# Altium PCB HV.PcbDoc (part 1 of 2)
Units mil, origin at the board's own origin, x right, y up, seen from the top; angles counter-clockwise.
Board outline 2765.94 x 3947.04 mil, 2 copper layers (Top Layer, Bottom Layer); 98 components, 67 nets, 300 pads, 27 vias.
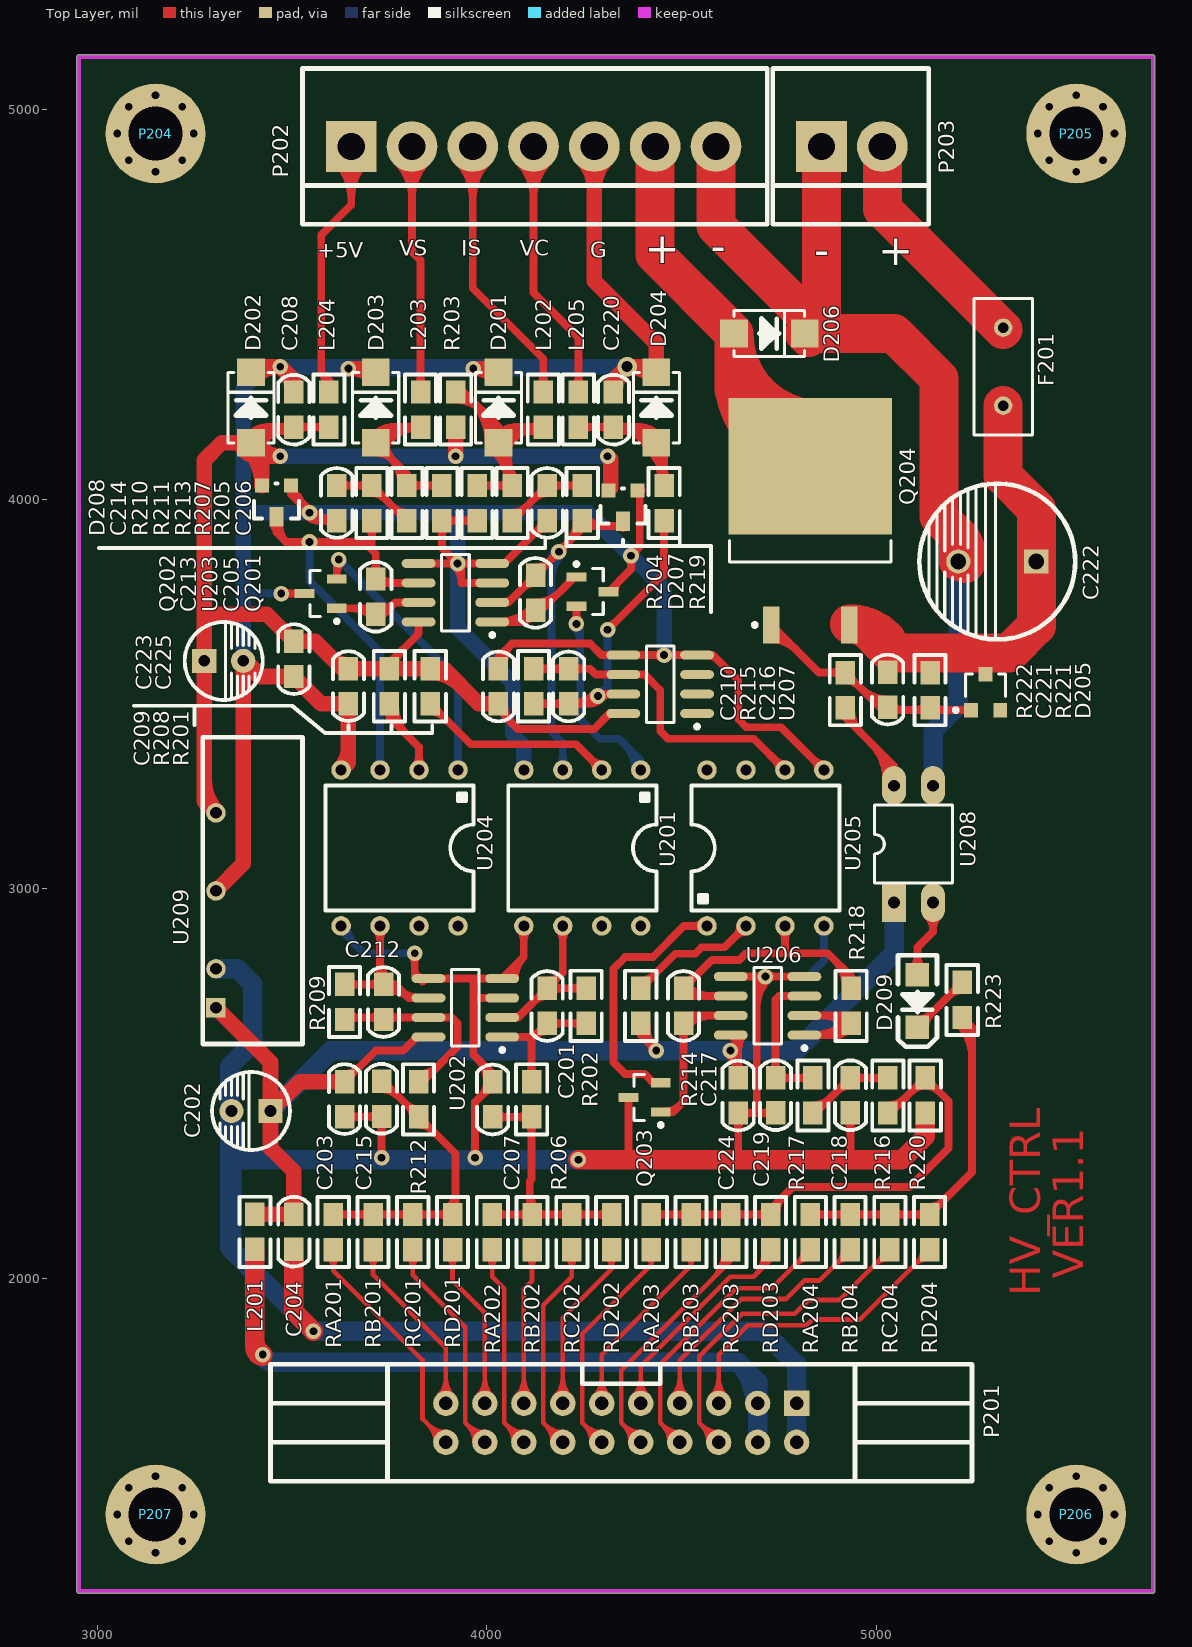
[diagram p0: Top Layer view]
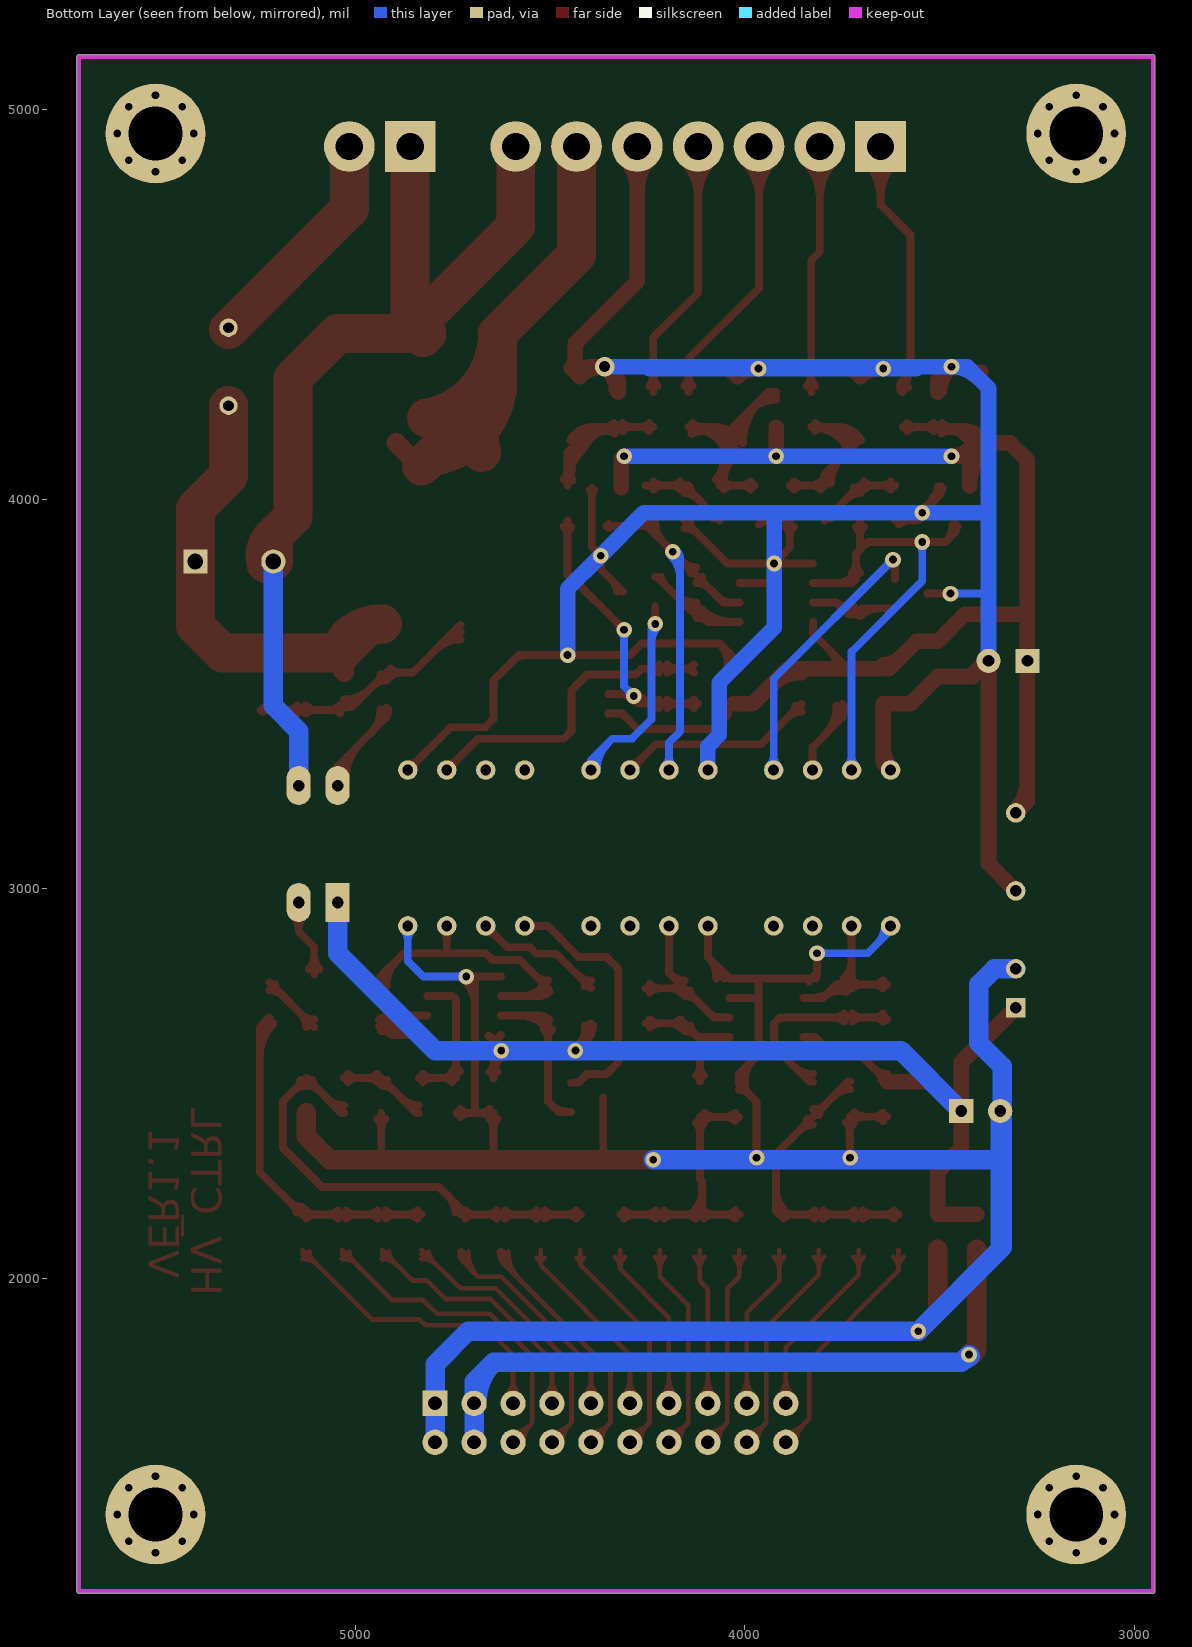
[diagram p1: Bottom Layer view, seen from below]

## Layer stack, top to bottom
Top Layer: signal copper 1.4
Dielectric: dielectric 12.6, FR-4, Dk 4.8
Bottom Layer: signal copper 1.4

## Board outline
2948.17,1197.99 ccw(c2953.19,1197.99) 2953.19,1192.98 5709.09,1192.98 ccw(c5709.09,1197.99) 5714.11,1197.99 5714.11,5135 ccw(c5709.09,5135) 5709.09,5140.02 2953.19,5140.02 ccw(c2953.19,5135) 2948.17,5135

## Design rules (kind name [scope] priority, off if disabled: settings)
Clearance [All] p1: gap=10
ComponentClearance [All] p1: gap=0 collisioncheckmode=3 verticalgap=0 showdistances=FALSE
PolygonConnect [All] p1: connectstyle=Relief reliefconductorwidth=10 reliefentries=4 polygonreliefangle="90 Angle"
RoomDefinition HV [InComponentClass('HV')] p1 off: confinementstyle=ConfineIn formatcopy=TRUE lockcomponents=FALSE outline 3006.1,1244.45 5656.1,1244.45 5656.1,5124.45 3006.1,5124.45
RoutingVias [All] p1: holewidth=28 width=50 viastyle="Through Hole" minholewidth=20 minwidth=40 maxholewidth=28 maxwidth=100
SilkscreenOverComponentPads [All] p1: minsilkscreentomaskgap=10
SolderMaskExpansion [All] p1: expansion=4
Width [All] p1: maxlimit=100 minlimit=10 preferedwidth=10
26 further rules are at their usual default settings.

## Components (designator, comment, footprint, x,y, rotation, side; value= is the part's Value field where it differs from the comment)
C201 "1nF" C0805 4155,2745 r270 top
C202 "Cap Pol2" CD1/2 3345,2430 r90 top
C203 "100nF" C0805 3635,2415.17 r90 top
C204 "100nF" C0805 3505,2075 r90 top
C205 "1nF" C0805 4125,3805 r270 top
C206 "100nF" C0805 4155,3945 r90 top
C207 "100nF" C0805 4015,2505 r270 top
C208 "100nF" C0805 3505,4275 r270 top
C209 "100nF" C0805 3645,3475 r90 top
C210 "100nF" C0805 4030,3565 r270 top
C212 "1nF" C0805 3735,2755 r270 top
C213 "1nF" C0805 3715,3795 r270 top
C214 "100nF" C0805 3615,3945 r90 top
C215 "100nF" C0805 3730,2416 r90 top
C216 "1nF" C0805 4210,3565 r270 top
C217 "1nF" C0805 4505,2745 r270 top
C218 "100nF" C0805 4933,2425.17 r90 top
C219 "100nF" C0805 4741,2425.17 r90 top
C220 "100nF" C0805 4325,4275 r270 top
C221 "100nF" C0805 5028.63,3466 r90 top
C222 "100uF/50V" CD2/4 5210,3840 r90 top
C223 "100uF/16V" CD1/2 3375,3585 r270 top
C224 "100nF" C0805 4645,2515 r270 top
C225 "100nF" C0805 3505,3635 r270 top
D201 "SMA6J18CA" SMA 4030,4235 r90 top
D202 "SMA6J18CA" SMA 3395,4235 r90 top
D203 "SMA6J18CA" SMA 3715,4235 r90 top
D204 "SMA6J18CA" SMA 4435,4235 r90 top
D205 "BZX84C12LT1" 318-07 5280,3505 r0 top
D206 "SMA6J36CA" SMA 4725,4425 r0 top
D207 "BAV99" SOT-23 4386.95,4022.77 r180 top
D208 "BAV99" SOT-23 3498,4035 r180 top
D209 "1N4148" D1206 5105,2780 r270 top
F201 "FRK300-60F" RAD-0.2 5325,4340 r270 top
L201 "BLM21PG331SN1" L0805 3405,2075 r90 top
L202 "BLM21AG601SN1" L0805 4145,4185 r90 top
L203 "BLM21AG601SN1" L0805 3830,4185 r90 top
L204 "BLM21PG331SN1" L0805 3595,4275 r270 top
L205 "BLM21AG601SN1" L0805 4235,4275 r270 top
P201 "Header 10X2" IDC20-EJ 4795,1680 r180 top
P202 "Header 7" 3.96-7 3651.99,4905 r180 top
P203 "24V_M" 3.96-2 4859,4905 r180 top
P204 "Header 9" LK 3150.04,4938.15 r0 top
P205 "Header 9" LK 5512.24,4938.15 r0 top
P206 "Header 9" LK 5512.24,1394.84 r0 top
P207 "Header 9" LK 3150.04,1394.84 r0 top
Q201 "MMBT3906" SOT23_N 4271.34,3762.6 r0 top
Q202 "MMBT3906" SOT23_N 3573.66,3757.6 r180 top
Q203 "MMBT3906" SOT23_N 4405,2465 r180 top
Q204 "IRF9540S" D2PAK_N 4830,3945 r90 top
R201 "100" R0805 3855,3565 r270 top
R202 "51K" R0805 4255,2655 r90 top
R203 "10K" R0805 3920,4185 r90 top
R204 "100K" R0805 4245,3945 r90 top
R205 "100K" R0805 4065,3945 r90 top
R206 "100" R0805 4115,2505 r270 top
R207 "10K" R0805 3975,3945 r90 top
R208 "100" R0805 3750,3565 r270 top
R209 "51K" R0805 3635,2665 r90 top
R210 "100K" R0805 3705,3945 r90 top
R211 "10K" R0805 3795,3945 r90 top
R212 "100" R0805 3825,2505 r270 top
R213 "10K" R0805 3885,3945 r90 top
R214 "100" R0805 4395,2655 r90 top
R215 "100K" R0805 4120,3475 r90 top
R216 "100K" R0805 5029,2515 r270 top
R217 "100K" R0805 4837,2515 r270 top
R218 "51K" R0805 4935,2744.83 r270 top
R219 "100" R0805 4455,3945 r90 top
R220 "100K" R0805 5125,2425 r90 top
R221 "10K" R0805 5137.25,3465 r90 top
R222 "10K" R0805 4920,3555 r270 top
R223 "330" R0805 5220,2670 r90 top
RA201 "0" R0805 3606.1,2164.45 r270 top
RA202 "0" R0805 4014.1,2164.45 r270 top
RA203 "0" R0805 4422.1,2164.45 r270 top
RA204 "0" R0805 4830.1,2164.45 r270 top
RB201 "0" R0805 3708.1,2164.45 r270 top
RB202 "0" R0805 4116.1,2164.45 r270 top
RB203 "0" R0805 4524.1,2164.45 r270 top
RB204 "0" R0805 4932.1,2164.45 r270 top
RC201 "0" R0805 3810.1,2164.45 r270 top
RC202 "0" R0805 4218.1,2164.45 r270 top
RC203 "0" R0805 4626.1,2164.45 r270 top
RC204 "0" R0805 5034.1,2164.45 r270 top
RD201 "0" R0805 3912.1,2164.45 r270 top
RD202 "0" R0805 4320.1,2164.45 r270 top
RD203 "0" R0805 4728.1,2164.45 r270 top
RD204 "0" R0805 5136.1,2164.45 r270 top
U201 "HCNR201" DIP-8-1 4395,3305 r270 top
U202 "LM2904D" 751-02_N 3945,2695 r180 top
U203 "LM2904D" 751-02_N 3919.49,3760 r180 top
U204 "HCNR201" DIP-8-1 3926.18,3305 r270 top
U205 "HCNR201" DIP-8-1 4565,2905 r90 top
U206 "LM2904D" 751-02_N 4720.51,2700 r180 top
U207 "LM2904D" 751-02_N 4445,3525 r180 top
U208 "TLP521" DIP4 5045,2965 r0 top
U209 "MORNSUN-BLS0505" MORNSUN-BLS 3305,2695 r270 top

## Footprints (in the part's own frame and the unit in brackets; to place one, negate y for a bottom-side part, rotate by r counter-clockwise, add the part's x,y. Pads: shape width x height; smd on the part's side, far side on the other; paste and mask are expansions set on the pad)
3.96-2 [mil]
  rect 130x130 hole 70: 1(0,0)
  round 130 hole 70: 2(-156,0)
  silkscreen extent -275,-200 125,200
3.96-7 [mil]
  rect 130x130 hole 70: 1(0,0)
  round 130 hole 70: 2(-156,0) 3(-312,0) 4(-468,0) 5(-624,0) 6(-780,0) 7(-936,0)
  silkscreen extent -1068,-200 125,200
318-07 [mm] "SOT-23; 3 Leads; Body 3.0 x 2.5 mm, inc. leads (LxW max)"
  rect 0.9x0.95 smd: 1(-0.95,-1.175) 2(0.95,-1.175) 3(0,1.175)
  silkscreen extent -2.07,-1.3 1.3,1.18
751-02_N [mm] "SOIC, 8-Leads, Body 4.9x3.9mm, Pitch 1.27mm, IPC Medium Density"
  oval 2.2x0.6 smd: 1(-2.4,1.905) 2(-2.4,0.635) 3(-2.4,-0.635) 4(-2.4,-1.905) 5(2.4,-1.905) 6(2.4,-0.635) 7(2.4,0.635) 8(2.4,1.905)
  silkscreen extent -2.53,-2.5 0.9,2.88, body extent -1.95,-2.45 1.95,2.45, height 1.75
C0805 [mil]
  rect 60x50 smd: 1(0,0) 2(90,0)
  silkscreen extent -44,-40 135,40
CD1/2 [mil]
  rect 62x62 hole 30: 1(0,-100)
  round 62 hole 30: 2(0,0)
  silkscreen extent -100,-150 100,50
CD2/4 [mil]
  rect 62x62 hole 40: 1(0,-200)
  round 62 hole 40: 2(0,0)
  silkscreen extent -200,-300 200,100
D2PAK_N [mm] "D2-PAK, 4-Leads, Body 8.8x10.4mm, Pitch 2.54mm, Lead Span 15.1mm, IPC Medium Density"
  rect 2.4x1.05 smd: 1(-6.8,2.54) 3(-6.8,-2.54)
  rect 8.9x10.65 smd: 2(3.55,0)
  silkscreen extent -6.92,-5.25 -1.3,5.25, body extent -2.7,-5.28 6.3,5.28, height 4.69
D1206 [mil]
  rect 60x60 smd: 1(0,0) 2(135,0)
  silkscreen extent -50,-50 185,50
DIP4 [mil]
  rect 62x100 hole 30: 1(0,0)
  oval 62x100 hole 30: 2(100,0) 3(100,300) 4(0,300)
  silkscreen extent -50,50 150,250
DIP-8-1 [mil]
  round 50 hole 28: 1(0,0) 2(0,-100) 3(0,-200) 4(0,-300) 5(400,-300) 6(400,-200) 7(400,-100) 8(400,0)
  silkscreen extent 40,-340 360,40
IDC20-EJ [mil]
  rect 65x65 hole 35: 1(0,0)
  round 65 hole 35: 2(0,100) 3(100,0) 4(100,100) 5(200,0) 6(200,100) 7(300,0) 8(300,100) 9(400,0) 10(400,100) 11(500,0) 12(500,100) 13(600,0) 14(600,100) 15(700,0) 16(700,100) 17(800,0) 18(800,100) 19(900,0) 20(900,100)
  silkscreen extent -450,-100 1350,200
L0805 [mil]
  rect 60x50 smd: 1(0,0) 2(90,0)
  silkscreen extent -45,-40 135,40
LK [mm]
  round 6.5 hole 3.5: 1(0,0)
  round 1 hole 0.5: 2(0,2.5) 3(2.5,0) 4(0,-2.5) 5(-1.75,-1.75) 6(-1.75,1.75) 7(1.75,1.75) 8(1.75,-1.75) 9(-2.5,0)
MORNSUN-BLS [mil]
  rect 50x50 hole 30: 1(0,0)
  round 50 hole 30: 2(-100,0) 4(-300,0) 6(-500,0)
  silkscreen extent -694,-34 93,222
R0805 [mil]
  rect 60x50 smd: 1(0,0) 2(90,0)
  silkscreen extent -45,-40 135,40
RAD-0.2 [mm] "Radial Cap, Thru-Hole; 2 Leads; 0.2 in Pin Spacing"
  round 1.2 hole 0.7: 1(-2.54,0) 2(2.54,0)
  silkscreen extent -4.44,-1.91 4.44,1.91
SMA [mm]
  rect 1.8x1.8 smd: 1(-2.3,0) 2(2.3,0)
  silkscreen extent -2.3,-1.5 2.3,1.5
SOT23_N [mm] "SOT23, 3-Leads, Body 2.9x1.3mm, Pitch 0.95mm, Lead Span 2.3mm, IPC Medium Density"
  rect 1.3x0.6 smd: 1(-1.05,0.95) 2(-1.05,-0.95) 3(1.05,0)
  silkscreen extent -1.17,-1.5 0.7,1.92, body extent -0.7,-1.5 0.7,1.5, height 1.1
SOT-23 [mil]
  rect 36x36 smd: 1(0,0) 2(75,0)
  rect 36x50 smd: 3(38,80)
  silkscreen extent -20,-5 95,85

## Part data
C202: "Polariz"
C222: library part CD1, "Electrolytic Capacitor"
C223: library part CD1, "El"
D205: "Zener Voltage Regulator Diode"
D207 D208: "Silicon Switching Diode Array for High-Speed Switching"
D209: library part 2JG
F201: library part FUSE1, "Fuse"
L203 L204: library part L1
P201: "Header, 10-P"
P202 P204 P205 P206 P207: "He"
P203: library part "Header 2", "He"
Q201 Q202 Q203: "PNP Switching Transistor"
Q204: "HEXFET P-Channel Power MOSFET"
U202 U203 U206 U207: "Dual Low-Power Operational Amplifier"
U209: library part MORNS

## Via types
v1: diameter 40, hole 20, Top Layer to Bottom Layer, 26 vias
v2: diameter 50, hole 28, Top Layer to Bottom Layer, 1 vias

## Nets (pads, with @x,y where several pads share a name; then routed paths per layer and width w, separated by ;. In a path a pad name is that pad's centre, name@x,y a point inside that pad or via, vN(x,y) a via of type N, cw(c..) or ccw(c..) an arc to the next point about the centre after c; other vN are vias at no path point)
+5V_HV: C208.2 C209.2 C210.2 C223.1 C225.1 D202.1 D207.2 D208.2 L204.2 R201.1 R203.1 R208.1 U203.8 U207.8 U209.6 | length 5364.1
  Top Layer w20: 3275,3625 3285,3635 ; D202.1@3382.15,4151.31 cw(c3438.32,4121.34) 3438.32,4185 ; D202.1@3395,4144.45 3435.55,4185 ; D202.1@3396.26,4169.85 ccw(c3398.83,4221.72) 3435.55,4185 ; D202.1@3399.79,4141.89 cw(c3471.66,4103.55) 3471.66,4185 ; D202.1@3417.44,4132.48 cw(c3505,4085.76) C208.2@3505,4185 ; D202.1@3420.4,4145.71 cw(c3472.27,4148.28) 3435.55,4185 ; 3463.46,4173.87 cw(c3473.5,4136.41) C208.2@3496.21,4167.84 ; C208.2@3480.04,4178.31 ccw(c3474.93,4197.36) C208.2@3492.01,4187.5 ; C208.2@3494.39,4174.39 ccw(c3468.79,4148.79) 3468.79,4185 ccw(c3468.79,4221.21) C208.2@3494.39,4195.61 ; C208.2@3515.61,4174.39 cw(c3541.21,4148.79) 3541.21,4185 cw(c3541.21,4221.21) C208.2@3515.61,4195.61 ; 3555,3635 3625,3565 3630,3565 C209.2@3645,3565 cw(c3645,3613.28) 3610.86,3579.14 ; 3576.72,3613.28 ccw(c3645,3681.57) C209.2@3645,3585 ; L204.2@3584.39,4174.39 ccw(c3558.79,4148.79) 3558.79,4185 ccw(c3558.79,4221.21) L204.2@3584.39,4195.61 ; L204.2@3595,4185 C208.2@3505,4185 ; R208.1@3750,3565 3750,3580 3825,3655 U203.8@3825,3685 ; R208.1@3765,3570 cw(c3825.36,3570) 3782.68,3612.68 ; 3979,3476 4045,3476 C210.2@4045,3460 ; 3991.37,3476 cw(c3991.37,3436.37) C210.2@4019.39,3464.39 ; 3996.2,3476 ccw(c3996.2,3508.8) C210.2@4019.39,3485.61 ; C210.2@4030,3475 C210.2@4045,3460 ; C210.2@4045,3470 ccw(c4105.36,3470) 4062.68,3427.32 ; U207.8@4350.51,3450 4315,3450 4275,3410 4080,3410 4045,3445 C210.2@4045,3460 ; 3435.55,4185 C208.2@3505,4185
  Top Layer w40: 3275,3279.5 ccw(c3389.5,3279.5) U209.6@3308.54,3198.54 ; U209.6@3305,3195 3275,3225 C223.1@3275,3585 3275,3625 3275,3705 ; D202.1@3372.34,4134.95 ccw(c3409.86,4150.68) D202.1@3409.86,4110 ; D202.1@3384.09,4155.36 cw(c3357.74,4181.71) 3357.74,4144.45 cw(c3357.74,4107.19) 3384.09,4133.54 cw(c3291.11,4040.56) D208.2@3422.6,4040.56 ; D202.1@3409.23,4150.42 ccw(c3470,4175.89) v1(3470,4110) 3429.45,4110 D202.1@3422.6,4116.85 ; D208.2@3422.6,4034.21 D202.1@3422.6,4116.85 ; 3602.32,3592.68 ccw(c3645,3635.36) C209.2@3645,3575 ; C209.2@3630,3565 3560,3635 3555,3635 C225.1@3505,3635 3435,3705 3275,3705 ; C209.2@3645,3565 R208.1@3750,3565 R201.1@3855,3565 3890,3565 3979,3476 3980,3475 C210.2@4030,3475 ; R201.1@3855,3555 cw(c3855,3446.36) 3931.82,3523.18 ; v1(3920,4110) R203.1@3920,4185 ; v1(4310,4110) 4317.6,4102.4 D207.2@4317.6,4029.21 ; 3275,3705 3275,4100 3319.45,4144.45 D202.1@3395,4144.45 D202.1@3422.6,4116.85
  Bottom Layer w40: v1(3470,4110) v1(3920,4110) v1(4310,4110)
A+5V: C202.1 C203.2 C204.2 C224.1 L201.2 R214.1 U202.8 U206.8 U208.1 U209.1 | length 3944.3
  Top Layer w20: C204.2@3495,2175 C204.2@3505,2165 ; C203.2@3635,2505.17 3714.83,2585 3785,2585 3820,2620 U202.8@3850.51,2620 ; C203.2@3635,2525.17 ccw(c3635,2573.46) 3669.14,2539.31 ; C203.2@3650,2510.17 cw(c3674.14,2510.17) C203.2@3657.07,2527.24 ; R214.1@4390,2650.22 ccw(c4434.02,2648.29) 4402.87,2617.13 ; R214.1@4395,2655 4395,2625 v1(4435,2585) cw(c4495.58,2645.59) R214.1@4409.99,2649.34 ; v1@4425,2585 ccw(c4400.86,2585) 4417.93,2602.07 ccw(c4435,2619.14) v1@4435,2595 ; v1@4425.34,2587.59 ccw(c4402.02,2593.84) 4422.93,2605.91 ccw(c4443.84,2617.98) v1@4437.59,2594.66 ; v1@4617.93,2577.93 cw(c4552.57,2512.57) C224.1@4645,2512.57 ; v1@4623.77,2594.92 ccw(c4619.51,2629.36) U206.8@4653.03,2620.38 ; v1@4625,2575 cw(c4625,2550.86) 4642.07,2567.93 cw(c4659.14,2585) v1@4635,2585 ; v1(4625,2585) 4645,2565 ; U206.8@4626.02,2625 4645,2606.02 4645,2565 ; v1@4626.23,2575.08 ccw(c4623.44,2597.58) 4645.35,2591.71 ; v1@4629.85,2576.26 ccw(c4612.4,2607.71) 4647.14,2598.4 ; v1@4632.07,2592.07 cw(c4600.86,2560.86) 4645,2560.86 ; C224.1@4634.39,2530.61 ccw(c4608.79,2556.21) 4645,2556.21 ccw(c4681.21,2556.21) C224.1@4655.61,2530.61 ; C224.1@4645,2515 4645,2565 ; 4645,2590.4 cw(c4692.12,2590.4) U206.8@4658.8,2623.72 ; 4645,2602.27 cw(c4668.39,2602.27) U206.8@4658.3,2623.37
  Top Layer w40: U209.1@3305,2695 3445,2555 C202.1@3445,2430 ; L201.2@3405,2165 C204.2@3505,2165 3505,2275 3445,2335 C202.1@3445,2430 ; C203.2@3635,2505.17 3520.17,2505.17 C202.1@3445,2430
  Bottom Layer w50: C202.1@3445,2430 3600,2585 v1(4435,2585) v1(4625,2585) 4795,2585 5045,2835 U208.1@5045,2965
AGND: C202.2 C203.1 C204.1 C207.1 C215.1 C218.1 C219.1 C224.2 P201.1 P201.2 Q203.3 R220.1 U201.5 U202.3 U202.4 U202.5 U204.5 U205.4 U206.4 U206.5 U209.2 | length 8987.7
  Top Layer w20: C203.1@3635,2415.17 3729.17,2415.17 C215.1@3730,2416 v1(3730,2310) ; C203.1@3645.61,2404.56 cw(c3671.21,2378.96) 3671.21,2415.17 cw(c3671.21,2451.38) C203.1@3645.61,2425.78 ; 3691.79,2415.17 ccw(c3691.79,2454.21) C215.1@3719.39,2426.61 ; 3695.79,2415.17 cw(c3695.79,2381.79) C215.1@3719.39,2405.39 ; C215.1@3719.39,2400.39 cw(c3693.79,2374.79) 3730,2374.79 cw(c3766.21,2374.79) C215.1@3740.61,2400.39 ; v1@3722.93,2317.07 ccw(c3705.86,2334.14) 3730,2334.14 ccw(c3754.14,2334.14) v1@3737.07,2317.07 ; v1@3807.93,2827.93 cw(c3790.86,2810.86) 3815,2810.86 cw(c3839.14,2810.86) v1@3822.07,2827.93 ; v1(3815,2835) 3815,2785 ; U202.5@3817.39,2770.79 ccw(c3806.22,2776.22) 3815,2785 ; U202.5@3834.85,2765.15 cw(c3832.94,2763.23) U202.5@3835.37,2762.05 ; v1@3962.93,2317.07 ccw(c3945.86,2334.14) 3970,2334.14 ccw(c3994.14,2334.14) v1@3977.07,2317.07 ; v1(3970,2310) 3970,2453.28 4015,2498.28 C207.1@4015,2505 4015,2525 3965,2575 3965,2770 ; 3970,2720 U202.3@4039.49,2720 ; 3978.79,2561.21 cw(c3927.57,2510) C207.1@4000,2510 ; 3988.18,2471.46 ccw(c3959.64,2500) C207.1@4000,2500 ; C207.1@3992.32,2475.61 cw(c4015,2452.93) C207.1@4015,2485 ; U202.4@4052.8,2769.57 cw(c4084.15,2770.31) 4061.98,2792.49 ; U202.4@4072.79,2770.04 cw(c4148.65,2771.85) 4095,2825.51 ; U201.5@4084.39,2894.39 cw(c4058.79,2868.79) 4095,2868.79 cw(c4131.21,2868.79) U201.5@4105.61,2894.39 ; U201.5@4095,2905 4095,2825.51 ; Q203.3@4363.66,2465 4363.66,2306.34 4365,2305 ; U206.5@4626.02,2775 v1@4695,2775 ; C224.2@4634.39,2409.39 cw(c4608.79,2383.79) 4645,2383.79 cw(c4681.21,2383.79) C224.2@4655.61,2409.39 ; 4645,2305 C224.2@4645,2425 4692.91,2425 ; C224.2@4655.61,2414.39 cw(c4681.21,2388.79) 4681.21,2425 cw(c4681.21,2461.21) C224.2@4655.61,2435.61 ; 4692.91,2697.54 cw(c4792.46,2697.54) 4722.07,2767.93 cw(c4739.14,2750.86) 4739.14,2775 cw(c4739.14,2799.14) v1@4722.07,2782.07 ; 4692.91,2745.82 cw(c4744.18,2745.82) 4707.93,2782.07 cw(c4690.86,2799.14) 4690.86,2775 cw(c4690.86,2750.86) v1@4707.93,2767.93 ; 4704.37,2425 ccw(c4704.37,2461.8) C219.1@4730.39,2435.78 ; 4705.2,2425 cw(c4705.2,2389.37) C219.1@4730.39,2414.57 ; C219.1@4740.83,2425 4692.91,2425 ; U206.4@4815,2775 v1(4715,2775) v1@4695,2775 ; C218.1@4922.39,2409.56 cw(c4896.79,2383.96) 4933,2383.96 cw(c4969.21,2383.96) C218.1@4943.61,2409.56 ; C218.1@4933,2425.17 4933,2307 4935,2305 ; 3815,2785 3830,2770 U202.5@3850.51,2770 3965,2770 ; 3965,2770 U202.4@4039.49,2770 4095,2825.51 ; 4692.91,2425 4692.91,2772.91 v1@4695,2775 ; 3815,2784.07 ccw(c3833.08,2784.07) 3820.3,2771.28 cw(c3833.08,2784.07) 3815,2784.07
  Top Layer w50: C204.1@3505,2075 3505,1915 v1(3555,1865) ; v1(4235,2305) 4365,2305 4645,2305 4935,2305 5065,2305 5125,2365 R220.1@5125,2425
  Bottom Layer w20: U204.5@3626.18,2905 3626.18,2893.82 3685,2835 v1(3815,2835) ; U204.5@3641.18,2905 ccw(c3704.39,2905) 3659.69,2860.31 ; v1@3807.93,2827.93 ccw(c3790.86,2810.86) 3790.86,2835 ccw(c3790.86,2859.14) v1@3807.93,2842.07 ; v1@3965,2305 v1(3970,2310) ; v1(4715,2775) 4825,2775 4865,2815 U205.4@4865,2905 ; v1@4722.07,2767.93 cw(c4739.14,2750.86) 4739.14,2775 cw(c4739.14,2799.14) v1@4722.07,2782.07 ; U205.4@4854.39,2894.39 cw(c4828.79,2868.79) 4865,2868.79 cw(c4901.21,2868.79) U205.4@4875.61,2894.39
  Bottom Layer w50: U209.2@3305,2795 3360,2795 3400,2755 3400,2605 3340,2545 C202.2@3340,2435 ; v1(4235,2305) 3965,2305 3345,2305 ; P201.2@4795,1580 P201.1@4795,1680 4795,1780 4710,1865 v1(3555,1865) 3345,2075 ; 3340,2305 3340,2080 3345,2075 ; 3340,2305 C202.2@3340,2425 ; 3340,2305 3345,2305 ; C202.2@3340,2425 C202.2@3345,2430 ; C202.2@3340,2425 C202.2@3340,2435 ; C202.2@3340,2435 C202.2@3345,2430 ; 3345,2075 3345,2305 ; 3345,2305 C202.2@3345,2430
GND24V: C222.2 D206.2 P202.7 P203.1 U208.3 | length 2870.4
  Top Layer w100: P202.7@4587.99,4905 4587.99,4701.01 4859,4430 ; 4806.16,4482.84 cw(c4748.32,4425) D206.2@4830.12,4425 ; D206.2@4815.55,4425 4864,4425 ; D206.2@4825.85,4414.7 ccw(c4745.82,4494.73) 4859,4494.73 ; P203.1@4859,4905 4859,4430 ; 5196.47,3918.53 cw(c5117.95,3840) C222.2@5229,3840 ; C222.2@5210,3840 5210,3905 ; C222.2@5228.28,3834.83 ccw(c5159.33,3854.33) 5210,3905 ; 4859,4430 4864,4425 ; 4864,4425 5045,4425 5160,4310 5160,3955 5210,3905
  Bottom Layer w50: U208.3@5145,3265 5145,3405 5210,3470 C222.2@5210,3840
GND_HV: C206.1 C208.1 C209.1 C210.1 C214.1 C220.1 C223.2 C225.2 D201.2 D202.2 D203.2 D204.2 D207.1 D208.1 P202.5 Q201.3 Q202.3 R207.1 R213.1 U201.4 U203.3 U203.4 U203.5 U204.4 U205.5 U207.4 U207.5 U209.4 | length 11420.7
  Top Layer w20: C223.2@3375.14,3584.01 cw(c3380.22,3547.14) 3406.54,3573.46 ; C223.2@3377.87,3564.2 cw(c3387.12,3497.13) 3435,3545 3395,3585 C223.2@3375,3585 C223.2@3380,3590 ; v1(3472.4,3757.6) Q202.3@3532.32,3757.6 ; v1@3479.47,3750.53 cw(c3496.54,3733.46) 3496.54,3757.6 cw(c3496.54,3781.74) v1@3479.47,3764.67 ; D208.1@3491.95,4027.77 cw(c3478.77,4014.6) 3497.4,4014.6 cw(c3516.03,4014.6) D208.1@3502.86,4027.77 ; D208.1@3497.4,4034.21 3497.4,4012.6 v1(3545,3965) 3565,3945 C214.1@3615,3945 cw(c3615,4031.66) v1@3552.24,3971.9 ; D208.1@3505.12,4033.23 ccw(c3573.55,4033.23) 3525.16,3984.84 ; 3515.75,4007.43 ccw(c3572.37,4030.78) v1@3548.84,3974.23 ; 3520.83,3995.11 ccw(c3551.64,4007.82) v1@3546.53,3974.88 ; v1@3537.76,3958.1 ccw(c3568.33,3987.22) 3568.33,3945 ; v1@3545,3955 cw(c3545,3930.86) 3562.07,3947.93 cw(c3579.14,3965) v1@3555,3965 ; C214.1@3604.39,3934.39 ccw(c3578.79,3908.79) 3578.79,3945 ccw(c3578.79,3981.21) C214.1@3604.39,3955.61 ; U203.5@3825,3835 v1(3925,3835) ; R213.1@3874.39,3929.39 cw(c3848.79,3903.79) 3885,3903.79 cw(c3921.21,3903.79) R213.1@3895.61,3929.39 ; R213.1@3895.61,3934.39 cw(c3921.21,3908.79) 3921.21,3945 cw(c3921.21,3981.21) R213.1@3895.61,3955.61 ; v1@3915,3835 ccw(c3890.86,3835) 3907.93,3852.07 ccw(c3925,3869.14) v1@3925,3845 ; v1@3917.93,3842.07 cw(c3900.86,3859.14) 3900.86,3835 cw(c3900.86,3810.86) 3917.93,3827.93 cw(c3876.72,3786.72) 3935,3786.72 ; v1@3932.07,3827.93 cw(c3949.14,3810.86) 3949.14,3835 cw(c3949.14,3859.14) v1@3932.07,3842.07 ; R207.1@3955,3945 R213.1@3885,3945 3885,3875 v1(3925,3835) ; R207.1@3964.39,3934.39 ccw(c3938.79,3908.79) 3938.79,3945 ccw(c3938.79,3981.21) R207.1@3964.39,3955.61 ; C210.1@4014,3566 C210.1@4030,3566 ; U203.3@4013.98,3785 3935,3785 3935,3825 v1(3925,3835) ; C210.1@4025.04,3569.4 cw(c4062.88,3573.97) 4035.93,3600.93 ; C210.1@4030,3565 C210.1@4030,3566 ; C210.1@4044.89,3571.8 cw(c4114.76,3580.23) 4065,3630 ; C210.1@4045,3566 C210.1@4030,3566 ; 4120.86,3910.86 cw(c4155,3876.72) C206.1@4155,3925 ; C206.1@4132.93,3922.93 ccw(c4115.86,3940) C206.1@4140,3940 ; C206.1@4155,3945 4045,3835 U203.4@4013.98,3835 v1(3925,3835) ; Q201.3@4312.68,3762.6 4370,3819.92 v1(4370,3855) 4392.72,3877.72 4392.72,4028.9 D207.1@4392.4,4029.21 ; Q201.3@4328.27,3762.6 cw(c4365.91,3762.6) 4339.29,3789.21 ; v1@4362.93,3847.93 cw(c4345.86,3830.86) 4370,3830.86 cw(c4394.14,3830.86) v1@4377.07,3847.93 ; v1@4370,3865 ccw(c4370,3889.14) 4387.07,3872.07 ccw(c4404.14,3855) v1@4380,3855 ; D207.1@4386.95,4022.77 cw(c4373.01,4008.84) D207.1@4392.72,4008.84 ; D207.1@4392.72,4010.36 cw(c4410.27,4010.36) D207.1@4397.86,4022.77 ; v1@4447.93,3592.93 ccw(c4430.86,3575.86) 4430.86,3600 ccw(c4430.86,3624.14) v1@4447.93,3607.07 ; v1@4462.07,3592.93 cw(c4479.14,3575.86) 4479.14,3600 cw(c4479.14,3624.14) v1@4462.07,3607.07 ; U207.4@4570.98,3598.19 cw(c4570.98,3572.05) 4589.47,3590.53 ; U205.5@4850,3305 ccw(c4813.79,3305) 4839.39,3330.61 ccw(c4865,3356.21) U205.5@4865,3320 ; U205.5@4865,3305 4755,3415 4666.18,3415 4645,3436.18 4645,3535 4580,3600 U207.4@4539.49,3600 v1(4455,3600) U207.5@4350.51,3600 4294.47,3600 4264.47,3630 4065,3630 ; v1@3535,3965 ccw(c3510.86,3965) 3527.93,3982.07 ccw(c3545,3999.14) v1@3545,3975 ; v1@3535,3965.02 ccw(c3511.07,3965.07) 3528.03,3981.96 cw(c3511.07,3965.07) v1@3535,3965.02 ; v1@3545.02,3975 cw(c3545.07,3999.35) 3527.82,3982.17 ccw(c3545.07,3999.35) v1@3545.02,3975 ; C210.1@4030,3566 4030,3595 4065,3630
  Top Layer w40: U209.4@3305,2995 3375,3065 C223.2@3375,3585 3415,3545 3435,3545 C225.2@3505,3545 3575,3475 C209.1@3645,3475 3645,3323.82 U204.4@3626.18,3305 ; D202.2@3395,4325.55 3415,4325.55 3429.45,4340 v1(3470,4340) 3505,4305 C208.1@3505,4275 ; D202.2@3405.91,4314.64 cw(c3467.14,4253.41) v1@3467.14,4340 ; v1@3478.79,4331.21 cw(c3427.57,4280) C208.1@3500,4280 ; U204.4@3622.65,3308.54 ccw(c3568.68,3362.5) 3645,3362.5 ; v1(3645,4335) 3705.55,4335 D203.2@3715,4325.55 ; v1@3654.93,4335 cw(c3654.93,4265.48) D203.2@3704.09,4314.64 ; v1(3965,4335) 4020.55,4335 D201.2@4030,4325.55 D201.2@4039.45,4335 ; v1@3969.93,4335 cw(c3969.93,4265.48) D201.2@4019.09,4314.64 ; P202.5@4244.17,4873.18 cw(c4167.35,4796.36) 4275.99,4796.36 cw(c4384.63,4796.36) P202.5@4307.81,4873.18 ; P202.5@4275.99,4905 4275.99,4559.01 4435,4400 D204.2@4435,4325.55 D204.2@4415,4325.55 ; C220.1@4325,4275 4325,4305 v2(4360,4340) 4400.55,4340 D204.2@4415,4325.55 ; C220.1@4330,4280 cw(c4402.43,4280) v2@4351.21,4331.21 ; v2@4362.02,4335.43 cw(c4381.31,4291.86) D204.2@4415,4325.55 ; v2@4362.86,4340 cw(c4362.86,4253.41) D204.2@4424.09,4314.64 ; D204.2@4424.09,4336.46 ccw(c4397.74,4362.81) 4435,4362.81 ccw(c4472.26,4362.81) D204.2@4445.91,4336.46
  Bottom Layer w20: 3375,3755 3377.6,3757.6 v1(3472.4,3757.6) ; v1@3465.33,3750.53 ccw(c3448.26,3733.46) 3448.26,3757.6 ccw(c3448.26,3781.74) v1@3465.33,3764.67
  Bottom Layer w40: C223.2@3375,3585 3375,3755 3375,3965 ; 3401.72,4311.72 cw(c3470,4243.43) v1(3470,4340) ; 3560,4335 v1(3645,4335) v1(3965,4335) 4130,4335 ; U201.4@4095,3305 4095,3366.18 4066.18,3395 4066.18,3528.82 3925,3670 v1(3925,3835) 3925,3960 3930,3965 ; 4245,4335 4130,4335 ; v2(4360,4340) 4135,4340 ; v1(4455,3600) 4455,3770 v1(4370,3855) 4260,3965 3930,3965 ; 3375,3965 v1(3545,3965) 3930,3965 ; 3375,3965 3375,4285 3430,4340 v1(3470,4340) ; v1(3470,4340) 4135,4340 ; 4130,4335 4135,4340
NetC201_1: C201.1 R202.2 U201.6 U202.2 | length 728.1
  Top Layer w20: U202.2@4039.49,2670 4080,2670 C201.1@4155,2745 ; U202.2@4070.98,2671.81 ccw(c4070.98,2697.95) 4089.47,2679.47 ; 4120.86,2710.86 cw(c4155,2676.72) C201.1@4155,2725 ; C201.1@4132.93,2722.93 ccw(c4115.86,2740) C201.1@4140,2740 ; C201.1@4155,2765 ccw(c4155,2813.28) 4189.14,2779.14 ; C201.1@4165.61,2734.39 cw(c4191.21,2708.79) 4191.21,2745 cw(c4191.21,2781.21) C201.1@4165.61,2755.61 ; C201.1@4170,2750 cw(c4194.14,2750) C201.1@4177.07,2767.07 ; U201.6@4184.39,2894.39 cw(c4158.79,2868.79) 4195,2868.79 cw(c4231.21,2868.79) U201.6@4205.61,2894.39 ; U201.6@4195,2905 4195,2785 C201.1@4155,2745 ; R202.2@4244.39,2734.39 ccw(c4218.79,2708.79) 4218.79,2745 ccw(c4218.79,2781.21) R202.2@4244.39,2755.61 ; R202.2@4255,2745 C201.1@4155,2745
NetC201_2: C201.2 R202.1 R206.1 U202.1 | length 574.6
  Top Layer w20: U202.1@4039.49,2620 4120,2620 ; R206.1@4104.39,2520.61 ccw(c4078.79,2546.21) 4115,2546.21 ccw(c4151.21,2546.21) R206.1@4125.61,2520.61 ; R206.1@4115,2505 4115,2615 4120,2620 ; 4120.86,2620.86 cw(c4155,2586.72) C201.2@4155,2635 ; C201.2@4132.93,2632.93 ccw(c4115.86,2650) C201.2@4140,2650 ; C201.2@4165.61,2644.39 cw(c4191.21,2618.79) 4191.21,2655 cw(c4191.21,2691.21) C201.2@4165.61,2665.61 ; R202.1@4244.39,2644.39 ccw(c4218.79,2618.79) 4218.79,2655 ccw(c4218.79,2691.21) R202.1@4244.39,2665.61 ; R202.1@4255,2655 C201.2@4155,2655 4120,2620
NetC205_1: C205.1 D207.3 R204.1 U201.3 U203.2 | length 1537.7
  Top Layer w20: U203.2@4013.98,3735 4055,3735 C205.1@4125,3805 v1(4185,3865) R204.1@4255,3935 ; U203.2@4045.47,3736.81 ccw(c4045.47,3764.18) 4064.83,3744.83 ; 4090.86,3770.86 cw(c4125,3736.72) C205.1@4125,3785 ; C205.1@4102.93,3782.93 ccw(c4085.86,3800) C205.1@4110,3800 ; C205.1@4125,3825 ccw(c4125,3873.28) 4159.14,3839.14 ; C205.1@4140,3810 cw(c4164.14,3810) C205.1@4147.07,3827.07 ; v1@4175,3865 cw(c4150.86,3865) 4167.93,3847.93 cw(c4185,3830.86) v1@4185,3855 ; v1@4185,3875 ccw(c4185,3899.14) 4202.07,3882.07 ccw(c4219.14,3865) v1@4195,3865 ; 4208.79,3888.79 ccw(c4157.57,3940) R204.1@4230,3940 ; R204.1@4245,3945 R204.1@4255,3935 ; R204.1@4255,3945 R204.1@4255,3935 ; R204.1@4255.61,3950.61 ccw(c4303.45,3998.45) 4303.45,3930.79 ; D207.3@4349.54,3925.33 ccw(c4336.37,3912.16) 4336.37,3930.79 ccw(c4336.37,3949.42) D207.3@4349.54,3936.24 ; D207.3@4355,3930.79 4259.21,3930.79 R204.1@4255,3935
  Bottom Layer w20: 4166.18,3795.43 cw(c4254.57,3795.43) v1@4192.07,3857.93 ; 4166.18,3843.71 cw(c4206.29,3843.71) v1@4177.93,3872.07 ; U201.3@4184.39,3315.61 ccw(c4158.79,3341.21) 4195,3341.21 ccw(c4231.21,3341.21) U201.3@4205.61,3315.61 ; v1(4185,3865) 4166.18,3846.18 4166.18,3403.82 4195,3375 U201.3@4195,3305
NetC205_2: C205.2 Q201.1 U203.1 | length 581.7
  Top Layer w20: U203.1@4013.98,3685 4095,3685 ; U203.1@4028.43,3685 ccw(c4028.43,3806.57) C205.2@4114.39,3720.61 ; 4076.72,3685 ccw(c4076.72,3758.28) C205.2@4128.54,3706.46 ; C205.2@4102.93,3692.93 ccw(c4085.86,3710) C205.2@4110,3710 ; C205.2@4123.44,3695.08 ccw(c4119.8,3660.21) 4095,3685 ; C205.2@4125,3735 ccw(c4125,3819.5) 4184.75,3759.75 ; 4150.61,3725.61 cw(c4125,3751.21) C205.2@4125,3715 ; 4206.92,3781.92 ccw(c4188.84,3800) Q201.1@4214.41,3800 ; Q201.1@4230,3800 4225,3800 4140,3715 C205.2@4125,3715 ; 4095,3685 C205.2@4125,3715
NetC206_2: C206.2 R204.2 R205.1 | length 464.8
  Top Layer w20: R205.1@4065,3945 C206.2@4155,4035 ; R205.1@4065,3965 ccw(c4065,4013.28) 4099.14,3979.14 ; R205.1@4080,3950 cw(c4104.14,3950) R205.1@4087.07,3967.07 ; 4120.86,4000.86 cw(c4155,3966.72) C206.2@4155,4015 ; C206.2@4132.93,4012.93 ccw(c4115.86,4030) C206.2@4140,4030 ; C206.2@4145,4035 C206.2@4155,4035 ; C206.2@4165.61,4024.39 cw(c4191.21,3998.79) 4191.21,4035 cw(c4191.21,4071.21) C206.2@4165.61,4045.61 ; R204.2@4234.39,4024.39 ccw(c4208.79,3998.79) 4208.79,4035 ccw(c4208.79,4071.21) R204.2@4234.39,4045.61 ; R204.2@4255,4035 R204.2@4245,4035 C206.2@4155,4035
NetC207_2: C207.2 R206.2 RA202.1 RB202.1 RC202.1 RD202.1 | length 1219.2
  Top Layer w20: RA202.1@4015,2165.35 RA202.1@4014.1,2164.45 RB202.1@4116.1,2164.45 ; C207.2@4015,2415 R206.2@4115,2415 4115,2255 4110,2250 4110,2170.55 RB202.1@4116.1,2164.45 ; RA202.1@4024.71,2153.84 cw(c4050.32,2128.24) 4050.32,2164.45 cw(c4050.32,2200.66) RA202.1@4024.71,2175.06 ; C207.2@4025.61,2404.39 cw(c4051.21,2378.79) 4051.21,2415 cw(c4051.21,2451.21) C207.2@4025.61,2425.61 ; R206.2@4104.39,2399.39 cw(c4078.79,2373.79) 4115,2373.79 cw(c4151.21,2373.79) R206.2@4125.61,2399.39 ; R206.2@4104.39,2404.39 ccw(c4078.79,2378.79) 4078.79,2415 ccw(c4078.79,2451.21) R206.2@4104.39,2425.61 ; RB202.1@4105.5,2153.84 ccw(c4079.89,2128.24) 4079.89,2164.45 ccw(c4079.89,2200.66) RB202.1@4105.5,2175.06 ; 4110,2220.39 ccw(c4167.05,2220.39) RB202.1@4126.71,2180.06 ; RB202.1@4126.71,2153.84 cw(c4152.32,2128.24) 4152.32,2164.45 cw(c4152.32,2200.66) RB202.1@4126.71,2175.06 ; RC202.1@4207.5,2153.84 ccw(c4181.89,2128.24) 4181.89,2164.45 ccw(c4181.89,2200.66) RC202.1@4207.5,2175.06 ; RC202.1@4228.71,2153.84 cw(c4254.32,2128.24) 4254.32,2164.45 cw(c4254.32,2200.66) RC202.1@4228.71,2175.06 ; RD202.1@4309.5,2153.84 ccw(c4283.89,2128.24) 4283.89,2164.45 ccw(c4283.89,2200.66) RD202.1@4309.5,2175.06 ; RD202.1@4320.1,2164.45 RC202.1@4218.1,2164.45 RB202.1@4116.1,2164.45
NetC212_1: C212.1 R209.2 U202.6 U204.6 | length 799.5
  Top Layer w20: R209.2@3635,2755 C212.1@3735,2755 ; R209.2@3645.61,2744.39 cw(c3671.21,2718.79) 3671.21,2755 cw(c3671.21,2791.21) R209.2@3645.61,2765.61 ; U204.6@3715.57,2894.39 cw(c3689.97,2868.79) 3726.18,2868.79 cw(c3762.39,2868.79) U204.6@3736.79,2894.39 ; C212.1@3724.39,2744.39 ccw(c3698.79,2718.79) 3698.79,2755 ccw(c3698.79,2791.21) C212.1@3724.39,2765.61 ; 3726.18,2817.5 ccw(c3792.5,2817.5) C212.1@3745.61,2770.61 ; U204.6@3726.18,2905 3726.18,2763.82 C212.1@3735,2755 ; C212.1@3733.6,2754.8 cw(c3745.64,2713.44) 3776.1,2743.9 ; C212.1@3739.19,2735.6 cw(c3756.42,2676.42) 3800,2720 ; C212.1@3747,2746 cw(c3765,2732.5) 3765,2755 ; C212.1@3747,2764 ccw(c3765,2777.5) 3765,2755 ; 3783.46,2736.54 ccw(c3819.02,2772.09) U202.6@3819.02,2721.81 ; U202.6@3850.51,2720 3800,2720 ; C212.1@3735,2755 3765,2755 ; 3765,2755 3800,2720
NetC212_2: C212.2 R209.1 R212.1 U202.7 | length 723.1
  Top Layer w20: R209.1@3635,2665 3640,2670 U202.7@3850.51,2670 3910,2670 3925,2655 3925,2595 3835,2505 R212.1@3825,2505 ; R209.1@3645.61,2659.39 cw(c3671.21,2633.79) 3671.21,2670 cw(c3671.21,2706.21) R209.1@3645.61,2680.61 ; C212.2@3724.39,2659.39 ccw(c3698.79,2633.79) 3698.79,2670 ccw(c3698.79,2706.21) C212.2@3724.39,2680.61 ; C212.2@3745.61,2659.39 cw(c3771.21,2633.79) 3771.21,2670 cw(c3771.21,2706.21) C212.2@3745.61,2680.61 ; R212.1@3825,2525 ccw(c3825,2597.43) 3876.21,2546.21
NetC213_1: C213.1 D208.3 R210.1 U203.6 U204.3 | length 1617.4
  Top Layer w20: 3454.54,3929.35 cw(c3441.37,3916.17) 3460,3916.17 cw(c3478.63,3916.17) 3465.46,3929.35 ; D208.3@3460,3935.79 3460,3915 3485,3890 ; D208.3@3467.71,3934.47 ccw(c3526.87,3931.88) 3485,3890 ; v1@3537.93,3882.93 ccw(c3520.86,3865.86) 3520.86,3890 ccw(c3520.86,3914.14) v1@3537.93,3897.07 ; v1@3552.07,3882.93 cw(c3569.14,3865.86) 3569.14,3890 cw(c3569.14,3914.14) v1@3552.07,3897.07 ; R210.1@3694.39,3929.39 cw(c3668.79,3903.79) 3705,3903.79 cw(c3741.21,3903.79) R210.1@3715.61,3929.39 ; C213.1@3704.39,3810.61 ccw(c3678.79,3836.21) 3715,3836.21 ccw(c3751.21,3836.21) C213.1@3725.61,3810.61 ; R210.1@3705,3945 3705,3870 ; C213.1@3725.61,3800.61 ccw(c3763.28,3838.28) 3763.28,3785 ; U203.6@3825,3785 3725,3785 C213.1@3715,3795 3715,3860 3705,3870 ; 3485,3890 v1(3545,3890) 3685,3890 3705,3870
  Bottom Layer w20: v1@3537.93,3882.93 cw(c3520.86,3865.86) 3545,3865.86 cw(c3569.14,3865.86) v1@3552.07,3882.93 ; v1(3545,3890) 3545,3790 3726.18,3608.82 U204.3@3726.18,3305 ; U204.3@3715.57,3315.61 ccw(c3689.97,3341.21) 3726.18,3341.21 ccw(c3762.39,3341.21) U204.3@3736.79,3315.61
NetC213_2: C213.2 Q202.1 U203.7 | length 364.5
  Top Layer w20: Q202.1@3615,3720.2 3699.8,3720.2 C213.2@3715,3705 3735,3705 3765,3735 ; 3654.17,3720.2 cw(c3654.17,3649.17) C213.2@3704.39,3699.39 ; C213.2@3713.43,3705.25 ccw(c3722.23,3731.87) 3742.05,3712.05 ; C213.2@3719.71,3724.24 ccw(c3733.62,3766.37) 3765,3735 ; U203.7@3825,3735 3765,3735
NetC214_2: C214.2 R210.2 R211.1 | length 444.8
  Top Layer w20: C214.2@3615,4035 R210.2@3705,4035 R211.1@3795,3945 ; C214.2@3625.61,4024.39 cw(c3651.21,3998.79) 3651.21,4035 cw(c3651.21,4071.21) C214.2@3625.61,4045.61 ; R210.2@3694.39,4024.39 ccw(c3668.79,3998.79) 3668.79,4035 ccw(c3668.79,4071.21) R210.2@3694.39,4045.61 ; R210.2@3705,4015 cw(c3705,3966.72) 3739.14,4000.86 ; R210.2@3720,4030 ccw(c3744.14,4030) R210.2@3727.07,4012.93 ; 3760.86,3979.14 ccw(c3795,4013.28) R211.1@3795,3965 ; R211.1@3772.93,3967.07 cw(c3755.86,3950) R211.1@3780,3950